# EAGLE board conduct-555-2 (EAGLE 6.5.0)
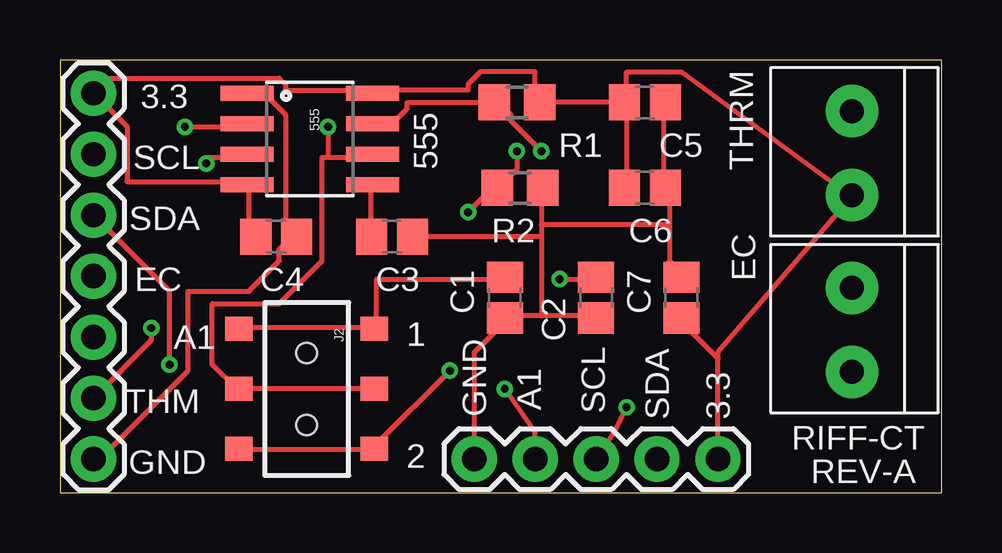
[diagram p0: board, top side]
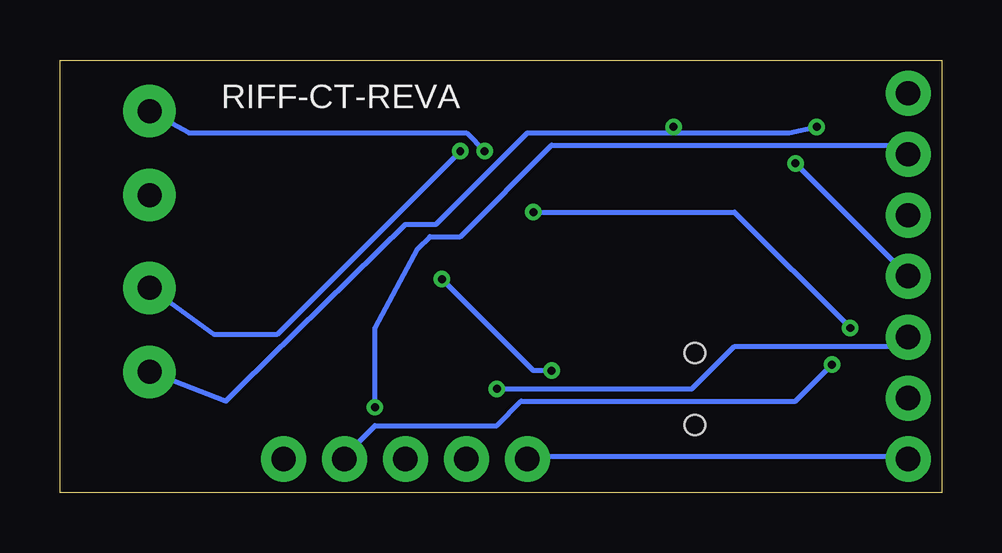
[diagram p1: board, bottom side, seen from below]

Size 36.75 x 18.02 mm. Coordinates in mm from the lower left corner, seen from the top.
Outline: 0,0 36.75,0 36.75,18.02 0,18.02 0,0
Copper layers (1*16): Top 0.0356mm / dielectric 1.5011mm / Bottom 0.0356mm
Design rules "LaenPCBOrder": minimum track width 6mil, minimum drill 13mil, track to track 6mil, track to pad 6mil, pad to pad 6mil, via to via 6mil, smd to smd 6mil, copper to edge 15mil, drill to drill 6mil, minimum pad ring 7mil, minimum via ring 7mil, stop-mask expansion 3mil, vias tented up to drill 0mil, thermal gap 10mil
Net classes: 0 default: width 0.203 mm, drill 0.33 mm, clearance 0.203 mm

## Footprints (pad centres in the part's own frame; a part is rotated, then mirrored left to right if it is on the bottom)
SO08@1 = smd 0.61 x 2.21: 1 -1.905,-2.616; 2 -0.635,-2.616; 3 0.635,-2.616; 4 1.905,-2.616; 5 1.905,2.616; 6 0.635,2.616; 7 -0.635,2.616; 8 -1.905,2.616
C0805 = smd 1.3 x 1.5: 1 -0.85,0; 2 0.85,0
1X2-3.5MM = drill 1 pad 2.184: 1 1.8,0; 2 -1.7,0
AYZ0202 = smd 1 x 1.15: 1 -2.5,2.825; 2 0,2.825; 3 2.5,2.825; 4 -2.5,-2.825; 5 0,-2.825; 6 2.5,-2.825 | hole 0.85: 1.5,0; -1.5,0
1X05 = drill 1.016 pad 1.88: 1 0,0; 2 2.54,0; 3 5.08,0; 4 7.62,0; 5 10.16,0
1X07 = drill 1.016 pad 1.88: 1 0,0; 2 2.54,0; 3 5.08,0; 4 7.62,0; 5 10.16,0; 6 12.7,0; 7 15.24,0
R0805 = smd 1.3 x 1.5: 1 -0.95,0; 2 0.95,0

## Placement (x,y rotation side)
555  NE555D  [SO08@1]  10.41,14.73 270 top
C1  1uF  [C0805]  18.54,8.13 270 top
C2  .1uF  [C0805]  22.35,8.13 270 top
C3  .01u  [C0805]  13.84,10.67 180 top
C4  100n  [C0805]  9.02,10.67 180 top
C5  100n  [C0805]  24.38,16.26 180 top
C6  .1uF  [C0805]  24.38,12.7 180 top
C7  1uF  [C0805]  25.91,8.13 270 top
EC  1X2-3.5MM  [1X2-3.5MM]  33.02,6.73 90 top
J2  AYZ0202  [AYZ0202]  10.29,4.32 270 top
JP2  [1X05]  17.27,1.4 0 top
JP4  [1X07]  1.4,1.4 90 top
R1  3.3K  [R0805]  19.05,16.26 180 top
R2  10k  [R0805]  19.18,12.7 180 top
THRM  1X2-3.5MM  [1X2-3.5MM]  33.02,14.1 90 top

## Library data of the parts
555 = SparkFun-AnalogIC
C1-C7 = resistor
EC THRM = adafruit
J2 = SparkFunNew
JP2 JP4 = SparkFun-Connectors
R1 R2 = rcl

## Nets
A1: JP2.2 JP4.3
EC: 555.3 JP4.4
GND: 555.1 C1.2 C2.2 C3.1 C4.1 C5.1 C6.1 C7.1 JP2.1 JP4.1 R2.1
N1: 555.2 555.6 EC.2 J2.2 J2.5
N$2: 555.5 C3.2
N$3: 555.7 EC.1 R1.2
N$6: C2.1 J2.3 J2.6
SCL: JP2.3 JP4.6
SDA: JP2.4 JP4.5
THRM: JP4.2 R2.2 THRM.1
VCC: 555.4 555.8 C4.2 C5.2 C6.2 C7.2 JP2.5 JP4.7 R1.1 THRM.2
VDD2: C1.1 J2.1 J2.4

## Tracks (layer width: path | path; a pad name or v marks a point on that pad's centre or on a via)
A1  (via drill 0.33)
  Top 0.203: v18.54,4.32 19.81,2.54 JP2.2
  Bottom 0.203: JP4.3 1.78,6.1 8.64,6.1 10.41,4.32 v18.54,4.32
EC  (via drill 0.33)
  Top 0.203: v6.1,13.72 6.1,13.97 7.62,13.97 555.3
  Bottom 0.203: JP4.4 v6.1,13.72
GND
  Top 0.203: C5.1 25.15,16.26 25.15,12.7 C6.1 25.4,12.7 25.4,11.18 | 25.4,11.18 25.4,9.65 25.91,9.14 C7.1 | 20.07,7.37 22.35,7.37 C2.2 | 20.07,7.37 18.54,7.37 C1.2 18.54,7.11 17.27,5.84 JP2.1 | 20.07,10.67 C3.1 | 20.07,11.18 20.07,12.7 R2.1 | 20.07,11.18 20.07,10.67 | 20.07,10.67 20.07,7.37 | 20.07,11.18 25.4,11.18 | 9.65,10.67 9.4,10.92 9.4,15.75 8.64,16.51 7.87,16.51 555.1 7.87,16.76 | 9.65,10.67 9.14,10.16 9.14,9.65 7.87,8.38 5.33,8.38 5.33,5.08 1.52,1.27 JP4.1 | 9.65,10.67 C4.1
  Bottom 0.203: JP4.1 1.52,1.52 17.27,1.52 JP2.1
N1  (via drill 0.33)
  Top 0.203: J2.2 J2.5 7.37,4.32 6.35,5.33 6.35,7.87 9.14,7.87 10.92,9.65 10.92,13.97 11.18,13.97 | 11.18,13.97 12.95,13.97 555.6 | v5.21,15.24 7.62,15.24 555.2 | v11.18,15.24 11.18,13.97
  Bottom 0.203: v5.21,15.24 6.35,14.99 11.18,14.99 | 11.18,14.99 17.27,14.99 21.08,11.18 22.35,11.18 29.21,4.45 29.84,3.81 EC.2 | 11.18,14.99 v11.18,15.24
N$2
  Top 0.203: C3.2 12.95,10.67 12.95,12.7 555.5
N$3  (via drill 0.33)
  Top 0.203: 555.7 13.21,15.49 13.97,15.49 14.48,16 14.48,16.26 R1.2 18.29,16.26 18.8,15.75 18.8,15.49 v20.07,14.22
  Bottom 0.203: v20.07,14.22 27.69,6.6 30.35,6.6 EC.1
N$6  (via drill 0.33)
  Top 0.203: J2.6 7.62,1.78 12.95,1.78 J2.3 13.21,2.03 v16.26,5.08 | v20.83,8.89 22.35,8.89 C2.1
  Bottom 0.203: v20.83,8.89 17.02,5.08 v16.26,5.08
SCL  (via drill 0.33)
  Top 0.203: v23.62,3.56 23.11,2.54 JP2.3
  Bottom 0.203: JP4.6 1.78,14.48 16.26,14.48 20.07,10.67 21.34,10.67 21.84,10.16 23.62,6.86 v23.62,3.56
SDA  (via drill 0.33)
  Top 0.203: JP4.5 4.57,8.38 v4.57,5.33
  Bottom 0.203: v4.57,5.33 6.1,3.81 17.53,3.81 18.54,2.79 23.62,2.79 24.89,1.52 JP2.4
THRM  (via drill 0.33)
  Top 0.203: v19.05,14.22 19.05,13.46 18.29,12.7 R2.2 18.03,12.7 v17.02,11.68 | JP4.2 3.81,6.35 v3.81,6.86
  Bottom 0.203: v19.05,14.22 19.81,14.99 31.37,14.99 THRM.1 | v3.81,6.86 8.64,11.68 v17.02,11.68
VCC
  Top 0.203: 27.43,5.59 25.91,7.11 C7.2 | JP2.5 27.43,5.59 | 33.02,12.32 27.43,5.84 27.43,5.59 | 23.62,16.26 23.62,12.7 C6.2 | C4.2 8.13,10.67 7.87,10.92 7.87,12.7 555.4 7.62,12.95 2.79,12.95 2.79,15.24 JP4.7 1.52,16.76 1.52,17.27 9.14,17.27 9.4,17.02 9.4,16.76 12.95,16.76 555.8 13.21,16.76 17.02,16.76 17.02,17.02 17.53,17.53 19.81,17.53 19.81,16.26 R1.1 C5.2 23.62,16.26 | 33.02,12.32 25.91,17.53 23.62,17.53 23.62,16.26 | 33.02,12.32 THRM.2
VDD2
  Top 0.203: J2.4 7.62,6.86 12.95,6.86 J2.1 13.21,6.86 13.21,8.89 18.54,8.89 C1.1

## Text on the board
tPlace: 3.3 | SCL | 555 | SDA | EC | A1 | 1 | THM | GND | A1 | SCL | SDA | 3.3 | RIFF-CT | GND | 2 | REV-A
bPlace: CERN OHL v1.2 | conductivity + temperature | publiclab.org/wiki/riffle | RIFF-CT-REVA